# Altium PCB PCBBlink.PcbDoc
Units mil, origin at the board's own origin, x right, y up, seen from the top; angles counter-clockwise.
Board outline 3391 x 3075 mil, 2 copper layers (Top Layer, Bottom Layer), stack 49.8 mil thick; 63 components, 43 nets, 154 pads, 9 vias.
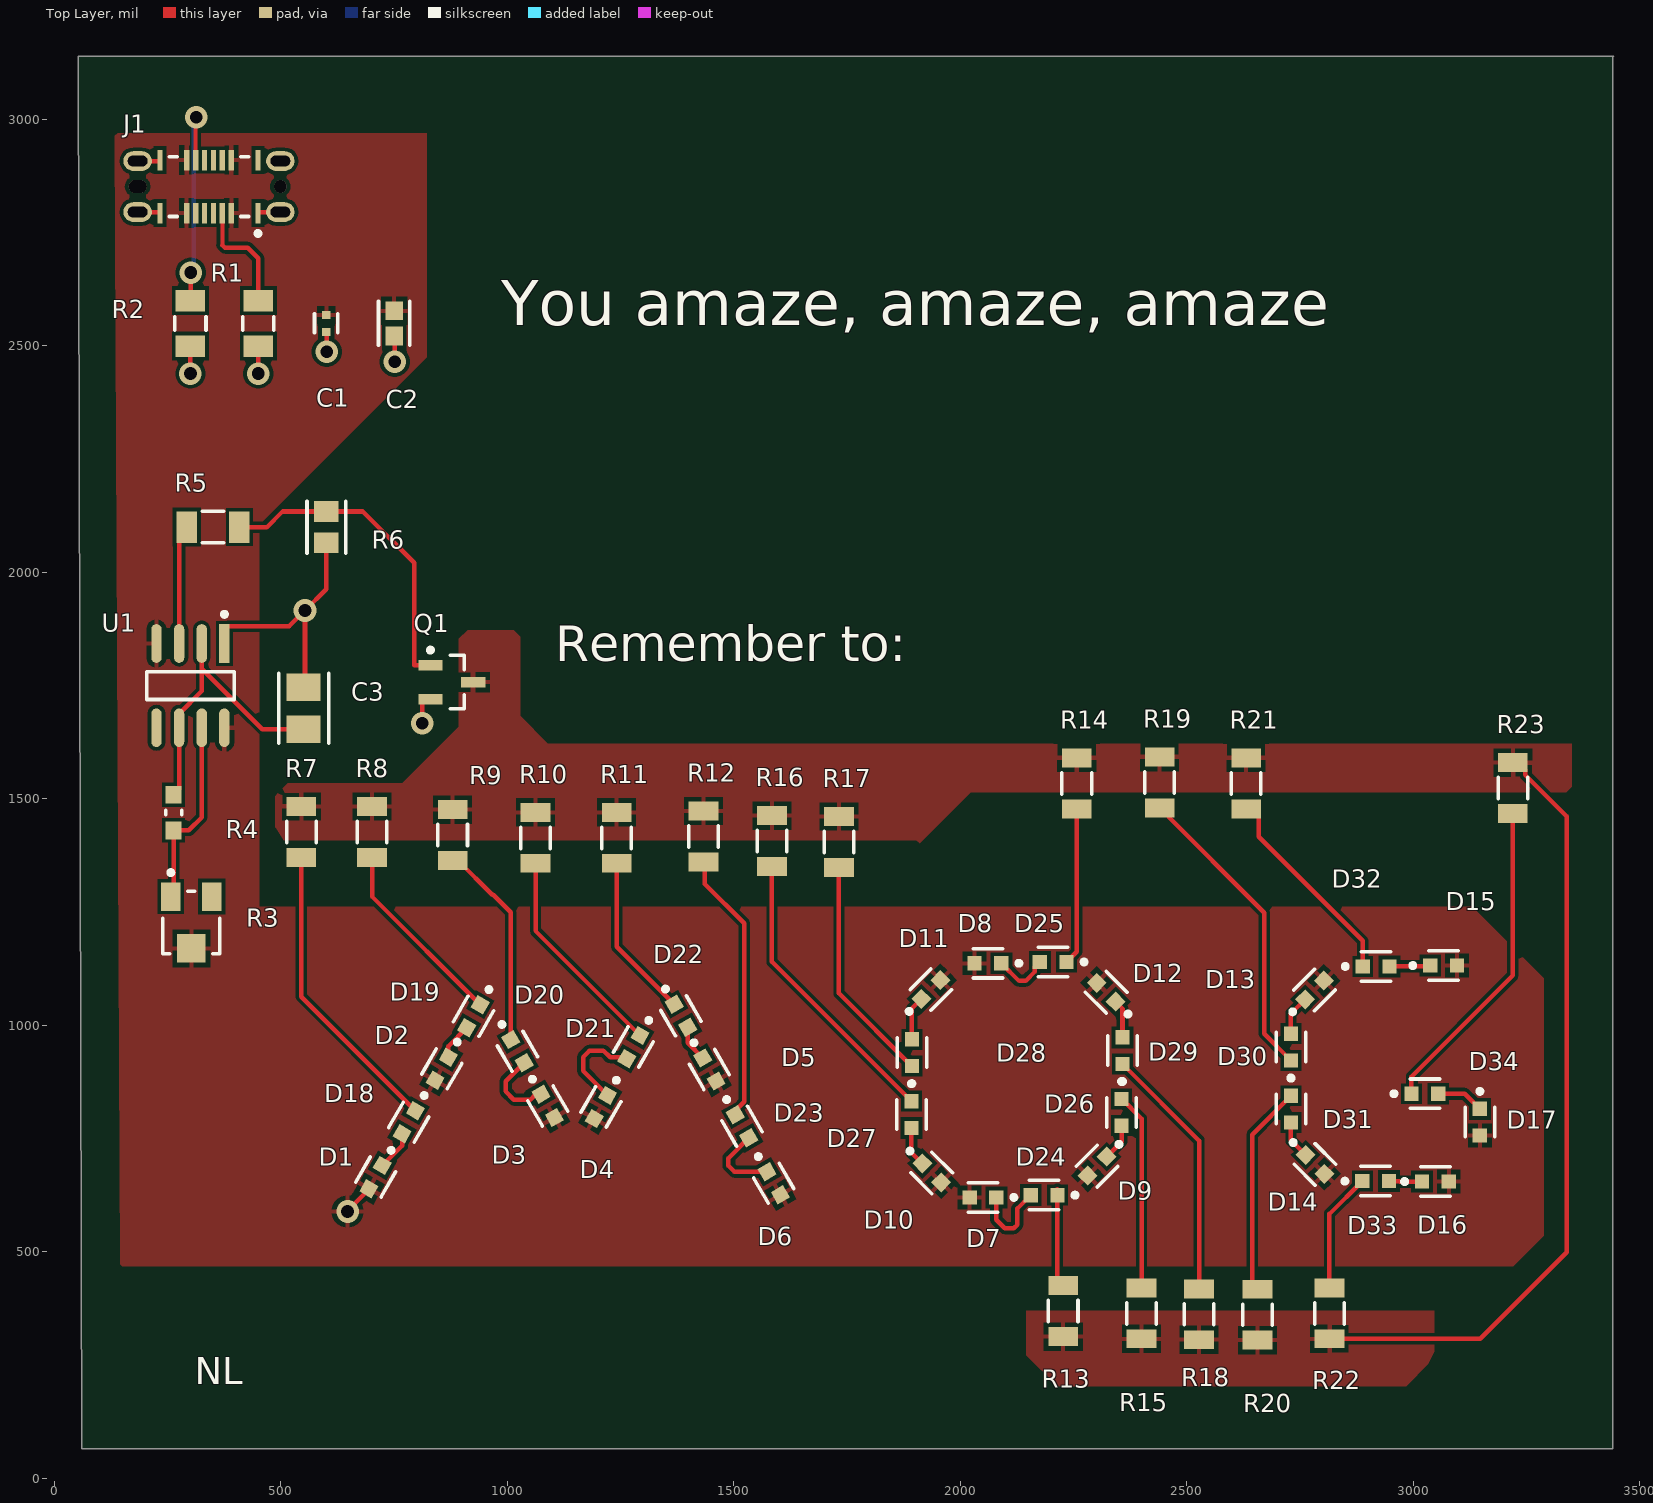
[diagram p0: Top Layer view]
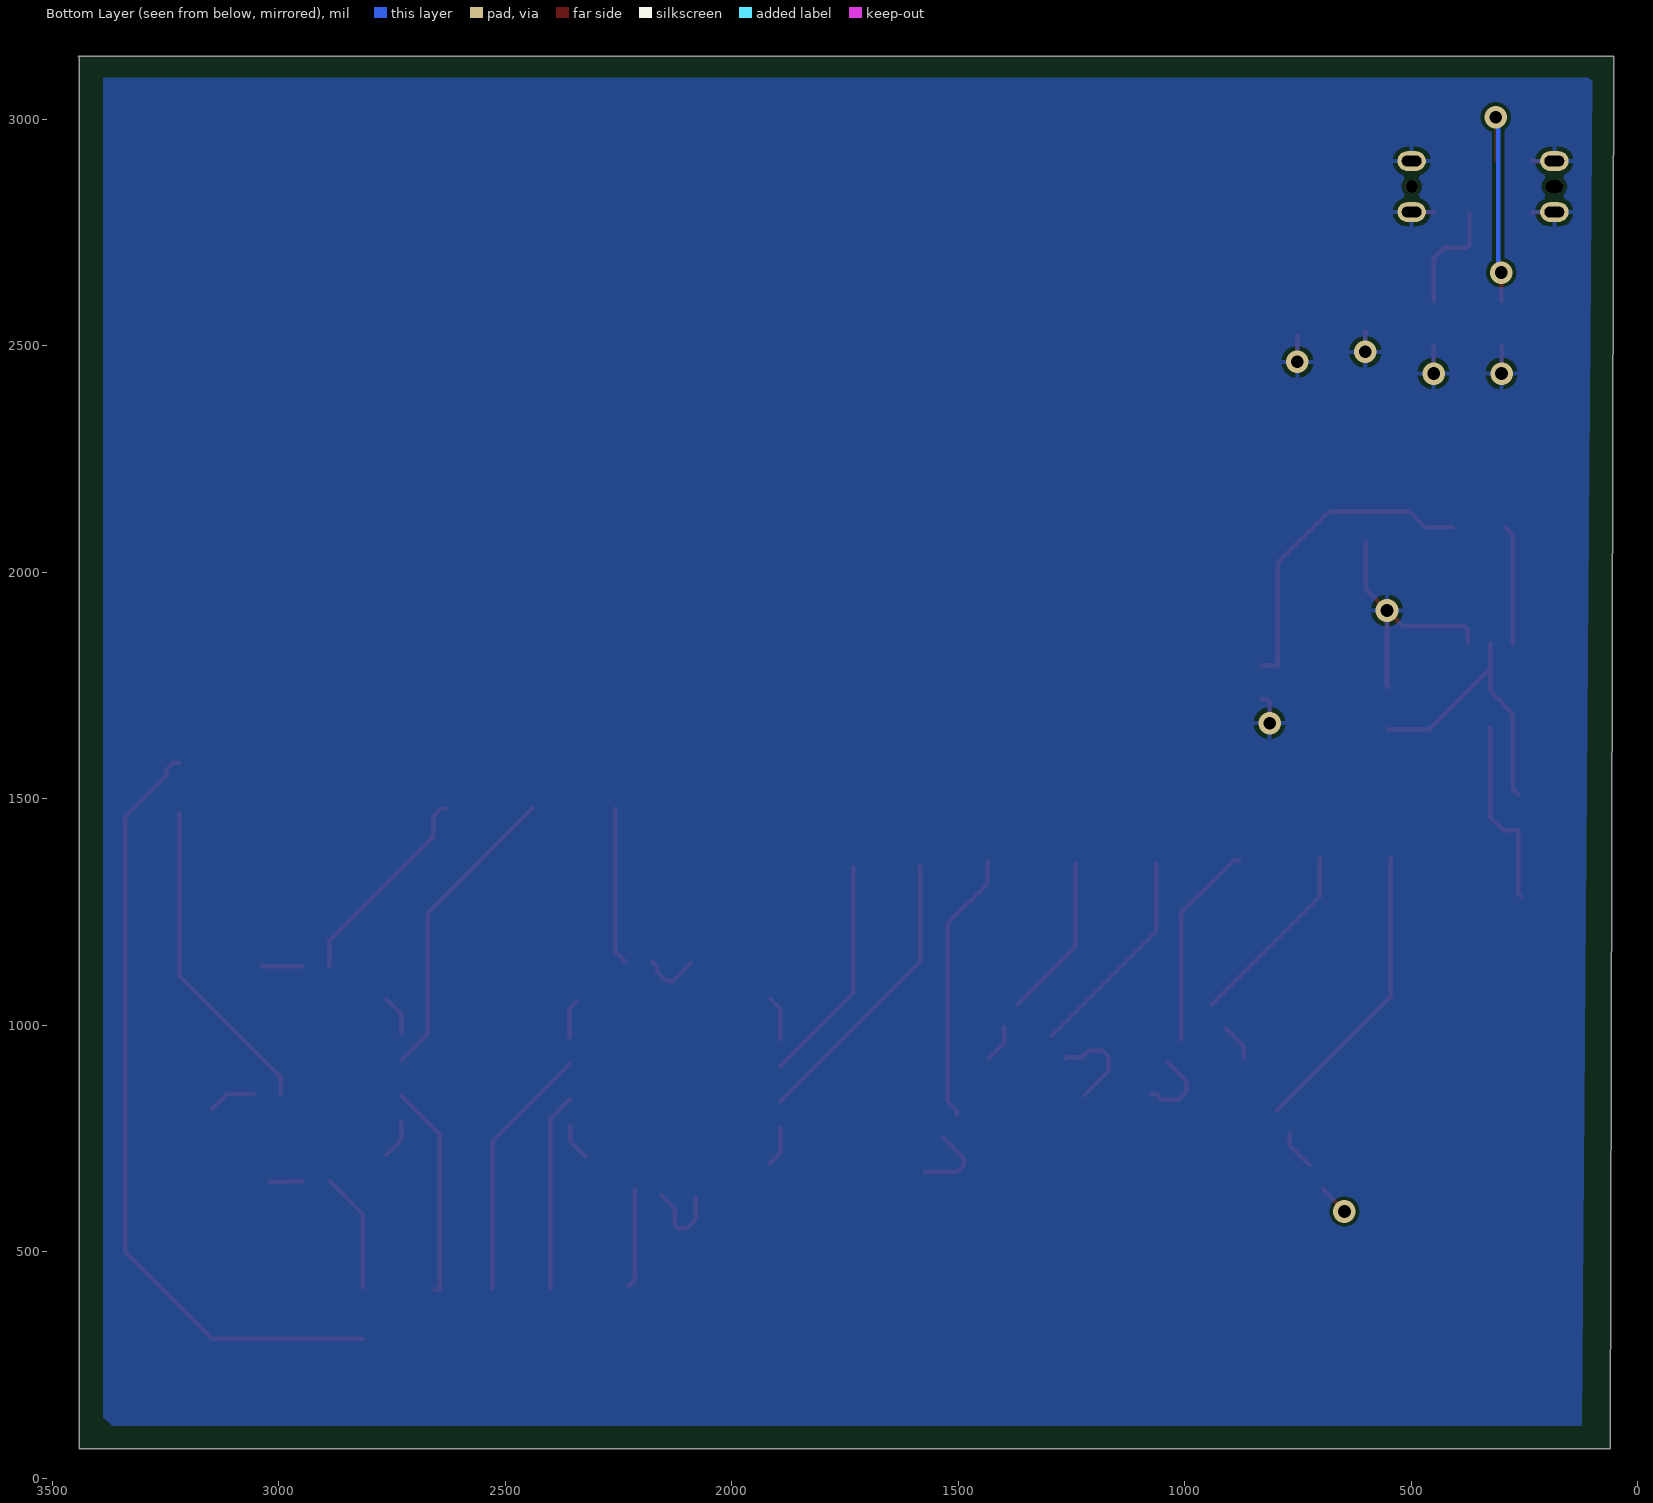
[diagram p1: Bottom Layer view, seen from below]
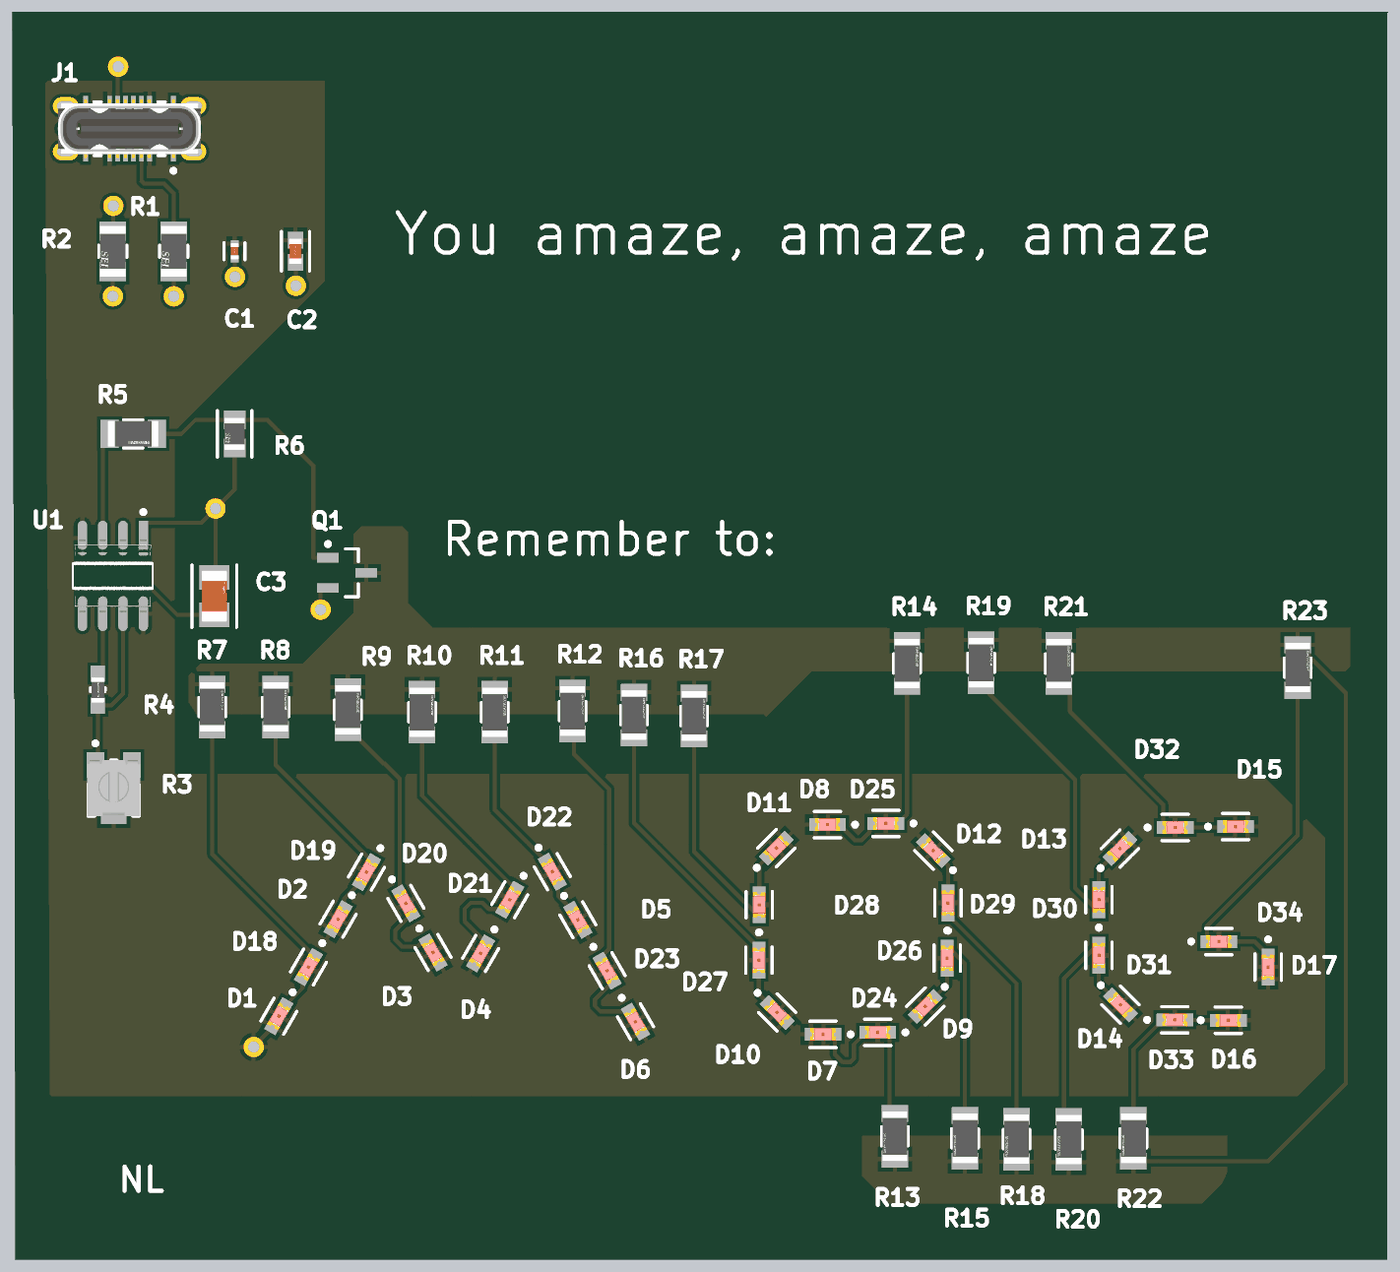
[diagram p2: 3D render of the assembled board from above, using the file's embedded part models]

## Layer stack, top to bottom
Top Solder: solder mask 0.4, Solder Resist, Dk 3.5
Top Layer: signal copper 1.4
Dielectric 1: core 47, FR-4, Dk 4.8
Bottom Layer: signal copper 1.4
Bottom Solder: solder mask 0.4, Solder Resist, Dk 3.5

## Board outline
52,3140 3443,3140 3440,3137 3440,65 60,65

## Design rules (kind name [scope] priority, off if disabled: settings)
BoardOutlineClearance [All] p1: gap=10 ignorepadtopadclearanceinfootprint=FALSE except(0: Arc-SplitContinuation Track-SplitContinuation SMDPad-SplitContinuation THPad-SplitContinuation Via-SplitContinuation Fill-SplitContinuation Poly-SplitContinuation Region-SplitContinuation Text-SplitContinuation)
Clearance [All] p1: gap=7.87 ignorepadtopadclearanceinfootprint=TRUE
MinimumSolderMaskSliver [All] p1: minsoldermaskwidth=7.87
PolygonConnect [All] p1: connectstyle=Relief reliefconductorwidth=10 reliefentries=4 polygonreliefangle="90 Angle" airgapwidth=10
RoutingVias [All] p1: holewidth=28 width=50 viastyle="Through Hole" minholewidth=28 minwidth=50 maxholewidth=28 maxwidth=50
SilkToSolderMaskClearance [IsPad] p1: minsilkscreentomaskgap=7.87 clearancetoexposedcopper=TRUE
SolderMaskExpansion [All] p1: expansion=0 istentingtop=FALSE
SupplyNets "Schematic Supply Nets_1" [InNet('5V_USB_IN')] p1: voltage=0.000
SupplyNets "Schematic Supply Nets" [InNet('GND')] p2: voltage=0.000
Width [All] p1: maxlimit=10 minlimit=9.06 preferedwidth=10 minimp=50.000000 maximp=50.000000 favimp=50.000000
28 further rules are at their usual default settings.

## Classes and differential pairs
component class Power: J1 R1 R2

## Components (designator, comment, footprint, x,y, rotation, side; value= is the part's Value field where it differs from the comment)
C1 "EMK105BJ104KV8F" FP-0402-L_1_0_0_05-W_0_5-MFG 600,2550 r270 top
C2 "TMK107AB7105MAHT" FP-0603-L_1_6_0_15-W_0_8-IPC_B 750,2550 r270 top
C3 "GCJ31CD7YA106KE02L" FP-GCJ31C-0_4-IPC_C 550,1700 r90 top
D1 "LTST-C190KRKT" FP-LTST-C190KRKT-MFG 709,665 r240 top
D2 "LTST-C190KRKT" FP-LTST-C190KRKT-MFG 855,904 r240 top
D3 "LTST-C190KRKT" FP-LTST-C190KRKT-MFG 1089,822 r300 top
D4 "LTST-C190KRKT" FP-LTST-C190KRKT-MFG 1206.27,819.65 r240 top
D5 "LTST-C190KRKT" FP-LTST-C190KRKT-MFG 1445.76,902.43 r300 top
D6 "LTST-C190KRKT" FP-LTST-C190KRKT-MFG 1587.93,651.26 r300 top
D7 "LTST-C190KRKT" FP-LTST-C190KRKT-MFG 2050,620 r180 top
D8 "LTST-C190KRKT" FP-LTST-C190KRKT-MFG 2061,1137 r180 top
D9 "LTST-C190KRKT" FP-LTST-C190KRKT-MFG 2302,689 r225 top
D10 "LTST-C190KRKT" FP-LTST-C190KRKT-MFG 1936.88,674.12 r315 top
D11 "LTST-C190KRKT" FP-LTST-C190KRKT-MFG 1935,1079 r45 top
D12 "LTST-C190KRKT" FP-LTST-C190KRKT-MFG 2322,1073 r135 top
D13 "LTST-C190KRKT" FP-LTST-C190KRKT-MFG 2782,1078 r45 top
D14 "LTST-C190KRKT" FP-LTST-C190KRKT-MFG 2783,693 r315 top
D15 "LTST-C190KRKT" FP-LTST-C190KRKT-MFG 3067,1132 r0 top
D16 "LTST-C190KRKT" FP-LTST-C190KRKT-MFG 3049,655 r0 top
D17 "LTST-C190KRKT" FP-LTST-C190KRKT-MFG 3147,786 r270 top
D18 "LTST-C190KRKT" FP-LTST-C190KRKT-MFG 782,786 r240 top
D19 "LTST-C190KRKT" FP-LTST-C190KRKT-MFG 925,1020 r240 top
D20 "LTST-C190KRKT" FP-LTST-C190KRKT-MFG 1022,943 r300 top
D21 "LTST-C190KRKT" FP-LTST-C190KRKT-MFG 1278,952 r240 top
D22 "LTST-C190KRKT" FP-LTST-C190KRKT-MFG 1383,1021 r300 top
D23 "LTST-C190KRKT" FP-LTST-C190KRKT-MFG 1518,777 r300 top
D24 "LTST-C190KRKT" FP-LTST-C190KRKT-MFG 2185,625 r180 top
D25 "LTST-C190KRKT" FP-LTST-C190KRKT-MFG 2205,1140 r180 top
D26 "LTST-C190KRKT" FP-LTST-C190KRKT-MFG 2356,808 r270 top
D27 "LTST-C190KRKT" FP-LTST-C190KRKT-MFG 1892,803 r270 top
D28 "LTST-C190KRKT" FP-LTST-C190KRKT-MFG 1893,939.53 r90 top
D29 "LTST-C190KRKT" FP-LTST-C190KRKT-MFG 2358,944 r90 top
D30 "LTST-C190KRKT" FP-LTST-C190KRKT-MFG 2730,952 r90 top
D31 "LTST-C190KRKT" FP-LTST-C190KRKT-MFG 2730,815 r270 top
D32 "LTST-C190KRKT" FP-LTST-C190KRKT-MFG 2918,1130 r0 top
D33 "LTST-C190KRKT" FP-LTST-C190KRKT-MFG 2917,656 r0 top
D34 "LTST-C190KRKT" FP-LTST-C190KRKT-MFG 3025.53,849 r0 top
J1 "USB4145-03-0230-C" FP-USB4145-03-0230-C-MFG 341,2852 r180 top
Q1 "BSS806N" INF-PG-SOT23_M 877.24,1757.6 r0 top
R1 "RMCF1206JT5K10" FP-RMCF1206-IPC_C 450,2550 r270 top
R2 "RMCF1206JT5K10" FP-RMCF1206-IPC_C 300,2550 r270 top
R3 "3313J-1-103E" BOUR-3313J-1_V 302,1227 r270 top
R4 "CMP0603AFX-1003ELF" FP-CMP0603A-MFG 262.82,1469.82 r270 top
R5 "RC3216J101CS" FP-RC3216-IPC_B 350,2100 r0 top
R6 "RMCF0805FT75K0" FP-RMCF0805-IPC_B 600,2100 r270 top
R7 "CR1206-FX-2150ELF" FP-CR1206-IPC_B 545,1427 r90 top
R8 "CR1206-FX-2150ELF" FP-CR1206-IPC_B 701,1427 r90 top
R9 "CR1206-FX-2150ELF" FP-CR1206-IPC_B 879,1420 r90 top
R10 "CR1206-FX-2150ELF" FP-CR1206-IPC_B 1062,1414 r90 top
R11 "CR1206-FX-2150ELF" FP-CR1206-IPC_B 1241,1414 r90 top
R12 "CR1206-FX-2150ELF" FP-CR1206-IPC_B 1433,1417 r90 top
R13 "CR1206-FX-2150ELF" FP-CR1206-IPC_B 2227,369 r270 top
R14 "CR1206-FX-2150ELF" FP-CR1206-IPC_B 2257,1534 r90 top
R15 "CR1206-FX-2150ELF" FP-CR1206-IPC_B 2400,364 r270 top
R16 "CR1206-FX-2150ELF" FP-CR1206-IPC_B 1584,1407 r90 top
R17 "CR1206-FX-2150ELF" FP-CR1206-IPC_B 1732,1404.82 r90 top
R18 "CR1206-FX-2150ELF" FP-CR1206-IPC_B 2527,362 r270 top
R19 "CR1206-FX-2150ELF" FP-CR1206-IPC_B 2440,1536 r90 top
R20 "CR1206-FX-2150ELF" FP-CR1206-IPC_B 2656,361 r270 top
R21 "CR1206-FX-2150ELF" FP-CR1206-IPC_B 2631,1534 r90 top
R22 "CR1206-FX-2150ELF" FP-CR1206-IPC_B 2815,364 r270 top
R23 "CR1206-FX-2150ELF" FP-CR1206-IPC_B 3220,1524 r90 top
U1 "TLC555CDR" FP-D0008A-IPC_B 300,1750 r270 top

## Footprints (in the part's own frame and the unit in brackets; to place one, negate y for a bottom-side part, rotate by r counter-clockwise, add the part's x,y. Pads: shape width x height; smd on the part's side, far side on the other; paste and mask are expansions set on the pad)
BOUR-3313J-1_V [mm] "SMD, 3-Leads, Body 3.5x3.2mm, Pitch 1.15mm"
  rect 1.6x1.1 smd paste+0: 1(-1.45,-1.15) 3(-1.45,1.15)
  rect 1.6x1.6 smd paste+0: 2(1.45,0)
  silkscreen extent -2.92,-1.6 1.75,1.6, body extent -1.75,-1.65 1.75,1.65, height 2.11
FP-0402-L_1_0_0_05-W_0_5-MFG [mm]
  rect 0.45x0.5 smd paste+0 mask+0: 1(-0.475,0) 2(0.475,0)
  silkscreen extent -0.53,-0.66 0.53,0.65, body extent -0.8,-0.38 0.8,0.38, height 0.25
FP-0603-L_1_6_0_15-W_0_8-IPC_B [mil]
  rect 41.64x37.88 smd paste+0 mask+0: 1(-27.65,0) 2(27.65,0)
  silkscreen extent -48,-35 48,35, body extent -58,-29 58,29, height 10
FP-CMP0603A-MFG [mm]
  rect 1x0.9 smd paste+0 mask+0: 1(-1,0) 2(1,0)
  silkscreen extent -0.13,-0.45 0.12,0.45, body extent -1.6,-0.55 1.6,0.55, height 0.25
FP-CR1206-IPC_B [mil]
  rect 41.66x65.44 smd paste+0 mask+0: 1(-56.18,0) 2(56.18,0)
  silkscreen extent -24,-33 24,33, body extent -87,-43 87,43, height 10
FP-D0008A-IPC_B [mil]
  rect 85.4x22.92 smd paste+0 mask+0: 1(-93.06,75)
  rrect100% 85.4x22.92 smd paste+0 mask+0: 2(-93.06,25) 3(-93.06,-25) 4(-93.06,-75) 5(93.06,-75) 6(93.06,-25) 7(93.06,25) 8(93.06,75)
  silkscreen extent -162,-97 31,97, body extent -146,-106 146,106, height 10
FP-GCJ31C-0_4-IPC_C [mil]
  rect 61.12x74.93 smd paste+0 mask+0: 1(-46.27,0) 2(46.27,0)
  silkscreen extent -77,-55 77,55, body extent -81,-43 81,43, height 10
FP-LTST-C190KRKT-MFG [mm]
  rect 0.8x0.8 smd paste+0 mask+0: 1(-0.75,0) 2(0.75,0)
  silkscreen extent -1.85,-0.82 0.82,0.82, body extent -1.25,-0.55 1.25,0.55, height 0.25
FP-RC3216-IPC_B [mil]
  rect 45.47x69.22 smd paste+0 mask+0: 1(-58.1,0) 2(58.1,0)
  silkscreen extent -24,-35 24,35, body extent -91,-44 91,44, height 10
FP-RMCF0805-IPC_B [mil]
  rect 45.46x53.63 smd paste+0 mask+0: 1(-34.48,0) 2(34.48,0)
  silkscreen extent -57,-43 57,43, body extent -67,-37 67,37, height 10
FP-RMCF1206-IPC_C [mil]
  rect 47.39x65.28 smd paste+0 mask+0: 1(-50.22,0) 2(50.22,0)
  silkscreen extent -15,-34 15,34, body extent -78,-38 78,38, height 10
FP-USB4145-03-0230-C-MFG [mm]
  rrect100% 1.6x1.1 hole 0.6 slot 1.1 at 0 deg paste-2539.97 mask+0: 1(-4,1.43) 2(4,1.43) 3(-4,-1.43) 4(4,-1.43)
  rect 0.3x1.15 smd paste+0 mask+0: A1(-2.75,1.485) A4(-1.25,1.485) A5(-0.75,1.485) A6(-0.25,1.485) A7(0.25,1.485) A8(0.75,1.485) A9(1.25,1.485) A12(2.75,1.485) B1(2.75,-1.485) B4(1.25,-1.485) B5(0.75,-1.485) B6(0.25,-1.485) B7(-0.25,-1.485) B8(-0.75,-1.485) B9(-1.25,-1.485) B12(-2.75,-1.485)
  round 0.71 hole 0.71 unplated paste-2539.97 mask+0: ""(-4,0)
  rrect100% 1.01x0.71 hole 0.71 slot 1.01 at 0 deg unplated paste-2539.97 mask+0: ""(4,0)
  silkscreen extent -2.88,-1.68 2.22,2.75, body extent -4.9,-2.16 4.9,2.16, height 0.25
INF-PG-SOT23_M [mm] "SOT23, 3-Leads, Body 2.9x1.3mm, Pitch 0.95mm, IPC Low Density"
  rect 1.35x0.6 smd: 1(-1.2,0.95) 2(-1.2,-0.95) 3(1.2,0)
  silkscreen extent -1.32,-1.5 0.7,1.92, body extent -0.7,-1.5 0.7,1.5, height 1.1

## Part data
C1: library part CMP-14477-001971-2, "None"
C2: library part CMP-14477-003841-2, "None", Capacitance=1uF, Case/Package=0603, Max Operating Temperature=125°C, Min Operating Temperature=-55°C, Ratings=AEC-Q200, Tolerance=20%, Voltage Rating=25V, Length=0.063inch, Mount="Surface Mount", Packaging="Tape and Reel", RoHS Compliant=Yes, Thickness=0.037inch, Width=0.031inch
C3: library part CMP-06035-004889-1, "Cap Ceramic 10uF 35V X7T 10% SMD 1206 +125°C Embossed Plastic T/R"
D1 D2 D3 D4 D5 D6 D7 D8 D9 D10 D11 D12 D13 D14 D15 D16 D17 D18 D19 D20 D21 D22 D23 D24 D25 D26 D27 D28 D29 D30 D31 D32 D33 D34: library part CMP-1674-00011-2, "LED RED CLEAR CHIP SMD", Case Code (Imperial)=0603, Case Code (Metric)=1608, Color=Red, Forward Current=30mA, Forward Voltage=2.4V, Lens Color=Colorless, Max Operating Temperature=85°C, Min Operating Temperature=-55°C, Package Quantity=1, Power Dissipation=75mW, Reverse Voltage=5V, Test Current=20mA, Case/Package=0603, Depth=0.8mm, Dominant Wavelength=631nm, Height=0.8mm, Illumination Color=Red, Lead Free="Lead Free", Length=1.6mm, Lens Style=Diffused, Lens Transparency=Clear, Luminous Intensity=54mcd, Mount="Surface Mount", Number of Elements=1, Number of LEDs=1, Number of Pins=2, Packaging="Tape and Reel", Power Rating=75mW, Radiation Hardening=No, Viewing Angle=130°, Wavelength=639nm, Width=0.8mm
J1: library part CMP-03329-129995627-1, "USB4145-03-0230-C USB Connectors USB-C Rec 3u Vert 16P SMT 2.3mm TH stakes H7.46mm T+R+Cap", Current Rating=6.25A, Max Operating Temperature=85°C, Min Operating Temperature=-25°C, Voltage Rating=48V, Contact Material="Gold, Nickel", Height=7.66mm, NexarPartId=129995627, Number Of Contacts=16, Usb Standard="USB 2.0"
Q1: library part CMP-1149-00036-1, "N-Channel OptiMOS 2 Small-Signal-Transistor, 20 V VDS, 2.3 A ID, -55 to 150 degC, PG-SOT23, Reel, Green", Manufacturer=Infineon, ComponentLink1Description="Manufacturer URL", ComponentLink1URL=http://www.infineon.com/, ComponentLink2Description=Datasheet, ComponentLink2URL=http://www.infineon.com/dgdl/BSS806N_Rev2.3_.pdf?folderId=db3a3043156fd573011622e10b5c1f67&fileId=db3a304330f686060131185f0553451c, ComponentLink3Description="Package Specification", ComponentLink3URL=http://www.infineon.com/dgdl/SOT23-Package_Overview.pdf?folderId=db3a30431936bc4b0119532290053c66&fileId=db3a30431936bc4b0119533468123c85, DatasheetVersion="Rev. 2.3", Green=TRUE, Halogen-free=TRUE, ID (max)="2.3Â A", IDpuls (max)="9.3Â A", Mounting Technology="Surface Mount", PackageDescription="3-Pin Small Outline Transistor Package, 2.9 x 1.3 mm Body, 0.95 mm Pitch", PackageReference=PG-SOT23, PackageVersion=Apr-08, Packing=Reel, PartNumber=BSS806N, Ptot (max)="0.5Â W", QG="1.7Â nC", RDS (on) (max)="57 mOhm", RDS (on) (max) (@1.8V)="82 mOhm", RDS (on) (max) (@2.5V)="57 mOhm", RthJA (max)="250 K/W", VDS (max)="20 V", VGS(th) (max)="0.75Â V", VGS(th) (min)="0.3Â V"
R1 R2: library part CMP-26527-004028-1, "5.1kΩ ±5% 0.25W 1206 Thick Film Chip Resistor AEC-Q200 compliant", Case Code (Imperial)=1206, Case Code (Metric)=3216, Max Operating Temperature=155°C, Max Power Dissipation=250mW, Min Operating Temperature=-55°C, Resistance=5.1kR, Resistor Type="Thick Film", Temperature Coefficient=200ppm/°C, Tolerance=5%, Case/Package=1206, Construction=Rectangular, Contact Plating=Tin, Depth=1.6mm, Features="Automotive AEC-Q200", Height=0.028inch, Lead Free="Lead Free", Length=0.126inch, Military Standard=Not, Mount="Surface Mount", Number of Terminations=2, Packaging="Tape and Reel", Power Rating=250mW, Radiation Hardening=No, RoHS Compliant=Yes, Series=RMCF, Size Code=1206, Width=0.063inch
R3: library part CMP-2000-05585-1, "Trimming Potentiometer, 10 KOhm, -55 to 125 degC, 3-Pin SMD, RoHS, Tape and Reel", Manufacturer=Bourns, Package Description="3-Pin Surface Mount Device, Body 3.5 x 3.2 mm, Pitch 1.15 mm", Package Reference=3313J-1, Power Rating=125mW, Resistance Tolerance=±20%, Temperature Coefficient=±100ppm/°C, Track Resistance=10kohm, Datasheet URL=http://www.bourns.com/docs/Product-Datasheets/3313.pdf, Datasheet Version=05/2016, Manufacturer URL=http://www.bourns.com/, Mounting Technology=SurfaceMount, No. of Turns=1, Potentiometer Mounting=SMD, RoHS Compliant=Yes, SVHC=NoSVHC(16-Jun-2014)
R4: library part CMP-07231-006018-1, "RESHIGHPOWERA 0603 100K 1% 1/4W"
R5: library part CMP-13261-003683-1, "Res Thick Film 1206 100Ω 5% 0.25W ±100ppm/°C Molded SMD T/R", Case Code (Imperial)=1206, Case Code (Metric)=3216, Max Operating Temperature=155°C, Max Power Dissipation=250mW, Min Operating Temperature=-55°C, Package Quantity=1, Resistance=100R, Temperature Coefficient=100ppm/°C, Tolerance=5%, Voltage Rating (DC)=200V, Case/Package=1206, Composition="Thick Film", Contact Plating=Tin, Depth=1.6mm, Features="Moisture Resistant", Height=0.026inch, Lead Free="Lead Free", Length=0.126inch, Military Standard=Not, Mount="Surface Mount", Number of Terminations=2, Packaging="Tape and Reel", Power Rating=250mW, Radiation Hardening=No, Width=0.063inch
R6: library part CMP-26527-001520-1, "75kΩ ±1% 0.125W 0805 Thick Film Chip Resistor AEC-Q200 compliant", Case Code (Imperial)=0805, Case Code (Metric)=2012, Max Operating Temperature=155°C, Max Power Dissipation=125mW, Min Operating Temperature=-55°C, Resistance=75kR, Resistor Type="Thick Film", Temperature Coefficient=100ppm/°C, Tolerance=1%, Case/Package=0805, Construction=Rectangular, Contact Plating=Tin, Depth=1.25mm, Features="Automotive AEC-Q200", Height=0.026inch, Length=0.079inch, Military Standard=Not, Mount="Surface Mount", Number of Terminations=2, Packaging="Tape and Reel", Radiation Hardening=No, RoHS Compliant=Yes, Series=RMCF, Width=0.049inch
R7 R8 R9 R10 R11 R12 R13 R14 R15 R16 R17 R18 R19 R20 R21 R22 R23: library part CMP-07231-000755-1, "Thick Film Chip Resistors 1206 215Ω 0.25W 1% 100ppm/°C", Case Code (Imperial)=1206, Case Code (Metric)=3216, Max Operating Temperature=155°C, Max Power Dissipation=250mW, Min Operating Temperature=-55°C, Package Quantity=5000, Resistance=215R, Temperature Coefficient=100ppm/°C, Tolerance=1%, Voltage Rating=200V, Case/Package=1206, Composition="Thick Film", Contact Plating=Tin, Depth=1.6mm, Features="Moisture Resistant", Height=0.03inch, Length=3.2mm, Military Standard=Not, Mount="Surface Mount", Number of Terminations=2, Packaging="Tape and Reel", Power Rating=250mW, Radiation Hardening=No, Termination=SMD/SMT, Thickness=610um, Width=0.063inch
U1: library part CMP-04857-000001-1, "IC OSC SGL TIMER 2.1MHZ 8-SOIC", Case/Package=SOIC, Current Rating=250A, Frequency=2.1MHz, High Level Output Current=-10mA, Low Level Output Current=100mA, Max Operating Temperature=125°C, Max Power Dissipation=725mW, Max Supply Voltage=15V, Min Operating Temperature=-40°C, Min Supply Voltage=2V, Operating Supply Current=360uA, Package Quantity=2500, Quiescent Current=250uA, Height=1.58mm, Lead Free="Lead Free", Length=4.9mm, Mount="Surface Mount", Number of Channels=1, Number of Pins=8, Number of Timers/Counters=1, Packaging="Tape and Reel", Power Dissipation=725mW, Radiation Hardening=No, REACH SVHC="No SVHC", Termination=SMD/SMT, Weight=0.002561oz, Width=3.91mm

## Via types
v1: diameter 50, hole 28, Top Layer to Bottom Layer, 9 vias

## Nets (pads, with @x,y where several pads share a name; then routed paths per layer and width w, separated by ;. In a path a pad name is that pad's centre, name@x,y a point inside that pad or via, vN(x,y) a via of type N, cw(c..) or ccw(c..) an arc to the next point about the centre after c; other vN are vias at no path point)
5V_USB_IN: C1.1 C2.1 D1.2 D2.2 D3.2 D4.2 D5.2 D6.2 D7.2 D8.2 D9.2 D10.2 D11.2 D12.2 D13.2 D14.2 D15.2 D16.2 D17.2 J1.A4 J1.A9 J1.B4 J1.B9 R3.2 U1.4 U1.8 | length 70
  Top Layer w10: v1(647,589) 647,590.6 690.54,634.14 690.54,635.73 D1.2
DISCH: R3.1 R4.2 U1.7 | length 420.8
  Top Layer w10: R3.1 262.82,1290.18 R4.2 296.45,1430.45 325,1459 U1.7
GND: C1.2 C2.2 C3.2 J1.1 J1.2 J1.3 J1.4 J1.A1 J1.A12 J1.B1 Q1.2 R1.2 R2.2 R6.2 U1.1 | length 1010.3
  Top Layer w10: J1.2 231.83,2795.7 232.73,2794.8 J1.A12 ; J1.4 231.83,2908.3 232.73,2909.2 J1.B1 ; v1(300,2439) R2.2 ; U1.1 375,1874.3 381.46,1880.76 517.76,1880.76 v1(553,1916) ; J1.A1 449.27,2794.8 450.17,2795.7 J1.1 ; v1(450,2439) R1.2 ; C3.2 553,1749.27 v1(553,1916) ; R6.2 600,1963 v1(553,1916) ; C1.2 600.5,2530.8 600.5,2487.5 v1(601,2487) ; C2.2 750,2518.5 751,2517.5 v1(751,2465) ; v1(812,1667) 812,1713.39 818.81,1720.2 Q1.2
LEDS: Q1.3 R7.2 R8.2 R9.2 R10.2 R11.2 R12.2 R13.2 R14.2 R15.2 R16.2 R17.2 R18.2 R19.2 R20.2 R21.2 R22.2 R23.2 | length 1740.4
  Top Layer w10: R22.2 3147.82,307.82 3339,499 3339,1461.18 3247.38,1552.8 3247.38,1564.35 3231.55,1580.18 R23.2
NetC3_1: C3.1 R4.1 U1.2 U1.6 | length 640
  Top Layer w10: R4.1 275,1521.37 U1.6 275,1688.19 325,1738.19 325,1787.48 ; U1.2 325,1787.48 ; C3.1 458.75,1653.73 325,1787.48
NetD1_1: D1.1 D18.2 | length 87.9
  Top Layer w10: D1.1 767.24,734.04 D18.2
NetD2_1: D2.1 D19.2 | length 81.6
  Top Layer w10: D2.1 869.76,953.96 D19.2
NetD3_1: D3.1 D20.2 | length 170.8
  Top Layer w10: D20.2 996,876.66 996,854 1014,836 1050.8,836 1062.37,847.57 D3.1
NetD4_1: D4.1 D21.2 | length 216.5
  Top Layer w10: D4.1 1167,899.26 1167,930 1181,944 1212,944 1226.72,929.28 1260.39,929.28 D21.2
NetD5_1: D5.1 D22.2 | length 81.2
  Top Layer w10: D22.2 1397.76,961.24 D5.1
NetD6_1: D6.1 D23.2 | length 170.6
  Top Layer w10: D23.2 1488,706.66 1488,690 1501.17,676.83 D6.1
NetD7_1: D7.1 D24.2 | length 184.2
  Top Layer w10: D7.1 2079.53,570.47 2098,552 2118,552 2126,560 2126,595.53 D24.2
NetD8_1: D8.1 D25.2 | length 124.7
  Top Layer w10: D8.1 2129.53,1098 2144,1098 2164.72,1118.72 2164.72,1129.25 D25.2
NetD9_1: D9.1 D26.2 | length 82.3
  Top Layer w10: D9.1 2356,743 D26.2
NetD10_1: D10.1 D27.2 | length 88.4
  Top Layer w10: D27.2 1892,719 D10.1
NetD11_1: D11.1 D28.2 | length 97.8
  Top Layer w10: D28.2 1893,1037 D11.1
NetD12_1: D12.1 D29.2 | length 84.9
  Top Layer w10: D12.1 2358,1037 D29.2
NetD13_1: D13.1 D30.2 | length 88.5
  Top Layer w10: D30.2 2730,1026 D13.1
NetD14_1: D14.1 D31.2 | length 84.9
  Top Layer w10: D31.2 2730,746 D14.1
NetD15_1: D15.1 D32.2 | length 90.8
  Top Layer w10: D32.2 3035.47,1130 D15.1
NetD16_1: D16.1 D33.2 | length 73.4
  Top Layer w10: D33.2 2969.61,656 2970.61,655 D16.1
NetD17_1: D17.1 D34.2 | length 105.8
  Top Layer w10: D34.2 3113.53,849 D17.1
NetD18_1: D18.1 R7.1 | length 663.5
  Top Layer w10: R7.1 545,1063.34 D18.1
NetD19_1: D19.1 R8.1 | length 424.1
  Top Layer w10: R8.1 701,1284.34 D19.1
NetD20_1: D20.1 R9.1 | length 456.7
  Top Layer w10: R9.1 890.89,1363.82 966.71,1288 969,1288 1007.24,1249.76 D20.1
NetD21_1: D21.1 R10.1 | length 475.8
  Top Layer w10: R10.1 1062,1208.34 D21.1
NetD22_1: D22.1 R11.1 | length 364
  Top Layer w10: R11.1 1241,1173.81 D22.1
NetD23_1: D23.1 R12.1 | length 603.7
  Top Layer w10: R12.1 1436,1357.82 1436,1312 1523,1225 1523,831.3 1503.24,811.53 D23.1
NetD24_1: D24.1 R13.1 | length 218.2
  Top Layer w10: D24.1@2214.06,638 2214.06,438.13 R13.1
NetD25_1: D25.1 R14.1 | length 347.1
  Top Layer w10: D25.1 2257,1162.47 R14.1
NetD26_1: D26.1 R15.1 | length 435.6
  Top Layer w10: D26.1 2400,793.53 R15.1
NetD27_1: D27.1 R16.1 | length 645.9
  Top Layer w10: R16.1 1584,1140.53 D27.1
NetD28_1: D28.1 R17.1 | length 505.3
  Top Layer w10: R17.1 1732,1071 D28.1
NetD29_1: D29.1 R18.1 | length 566.3
  Top Layer w10: D29.1 2527,745.47 R18.1
NetD30_1: D30.1 R19.1 | length 677.5
  Top Layer w10: R19.1 2671,1248.82 2671,981.47 D30.1
NetD31_1: D31.1 R20.1 | length 474.8
  Top Layer w10: R20.1 2644.11,417.18 2644.11,758.64 D31.1
NetD32_1: D32.1 R21.1 | length 461.4
  Top Layer w10: R21.1 2642.89,1477.82 2658.72,1461.99 2658.72,1416.25 2888.47,1186.49 D32.1
NetD33_1: D33.1 R22.1 | length 265.8
  Top Layer w10: R22.1 2815,583.53 D33.1
NetD34_1: D34.1 R23.1 | length 711.6
  Top Layer w10: D34.1 2996,886.14 3220,1110.14 R23.1
NetJ1_A5: J1.A5 R1.1 | length 255.5
  Top Layer w9.06: 370.53,2722.86 J1.A5
  Top Layer w10: 370.53,2722.86 376.39,2717 426.43,2717 450,2693.43 R1.1
NetJ1_B5: J1.B5 R2.1 | length 505.3
  Top Layer w9.06: J1.B5 v1@311.47,3003.47
  Top Layer w10: R2.1 301,2601.22 v1(301,2662) ; v1@311.47,3003.47 v1(313,3005)
  Bottom Layer w10: v1(301,2662) 307,2668 307,2999 v1(313,3005)
NetQ1_1: Q1.1 R5.2 R6.1 | length 709.2
  Top Layer w10: R5.2 469,2100 503.48,2134.48 R6.1 680.52,2134.48 794,2021 794,1795 Q1.1
NetR5_1: R5.1 U1.3 | length 263.9
  Top Layer w10: U1.3 275,2083.1 R5.1
pads on no net: J1. J1.A6 J1.A7 J1.A8 J1.B6 J1.B7 J1.B8 J1.B12 R3.3 U1.5

## Polygon pours and split planes (outlines as drawn)
5V_USB_IN on Top Layer "5V_USB_IN_L01_P012" (solid, pour order 12): 133,2970 822,2970 822,2475 452,2105 452,1262 3130,1262 3288,1104 3288,535 3221,468 149.01,468 cw(c149.01,472.33) 144.69,472.31
LEDS on Top Layer "LEDS_L01_P008" (solid, remove dead copper, pour order 8): 489,1435 487,1437 487,1506 515,1534 768,1534 893,1659 893,1853 912,1872 1014,1872 1028,1858 1028,1683 1089,1622 3350,1622 3350,1527 3338,1515 2023,1515 1910,1402 1903,1409 506,1409
LEDS on Top Layer "LEDS_L01_P009" (solid, remove dead copper, pour order 9): 2146,370 2146,272 2215,203 2984,203 3033.5,252.5 3046,279 3046,370
GND on Bottom Layer "GND_L02_P000" (solid, remove dead copper, pour order 0): 100,3097 105,3092 3387,3092 3387,135 3368,116 123,116

## Silkscreen, mask and mechanical layers (free items; w line width, h text height)
Top Overlay:
  text "You amaze, amaze, amaze" at 986,2546.11 h99.37
  text "Remember to:" at 1105,1804 h78.74
  text "NL" at 310,207 h60